# Altium PCB WLS.PcbDoc
Units mil, origin at the board's own origin, x right, y up, seen from the top; angles counter-clockwise.
Board outline 4800 x 7000 mil, 2 copper layers (Top Layer, Bottom Layer), stack 12.8 mil thick; 34 components, 41 nets, 135 pads, 0 vias.
Unrouted connection lines stored in the file: 8.
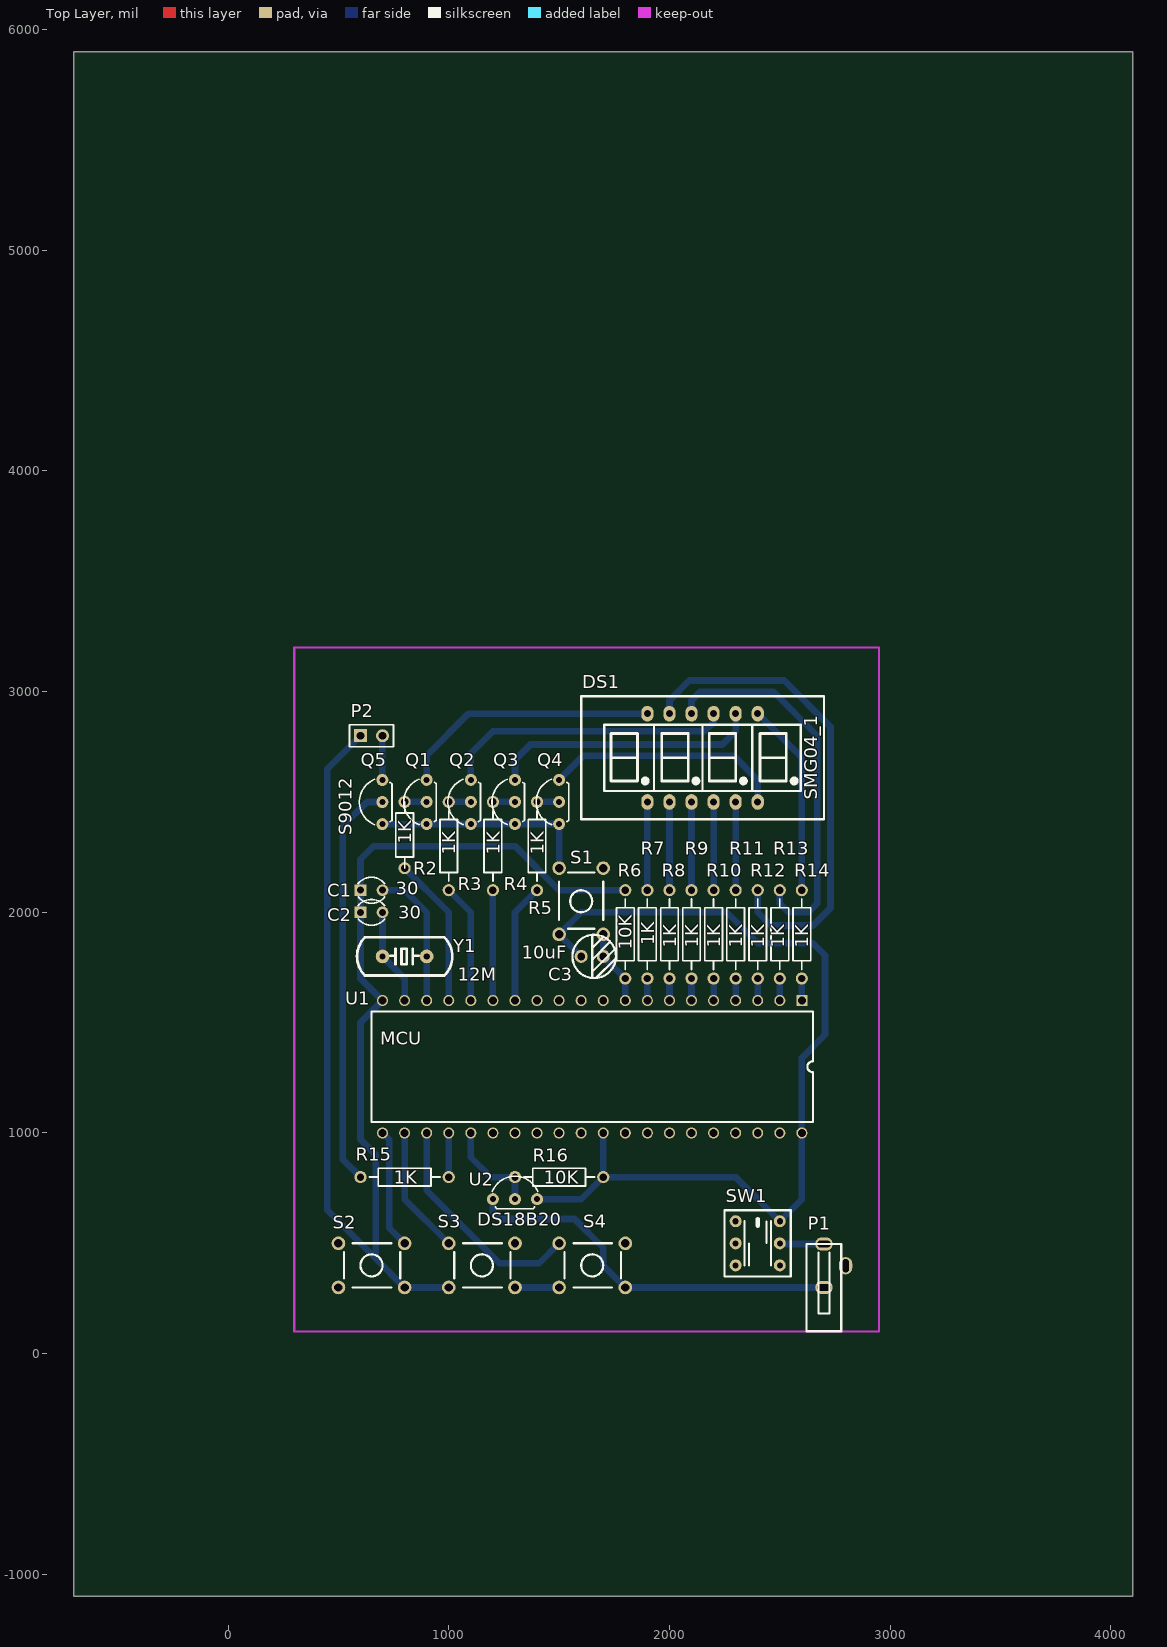
[diagram p0: Top Layer view]
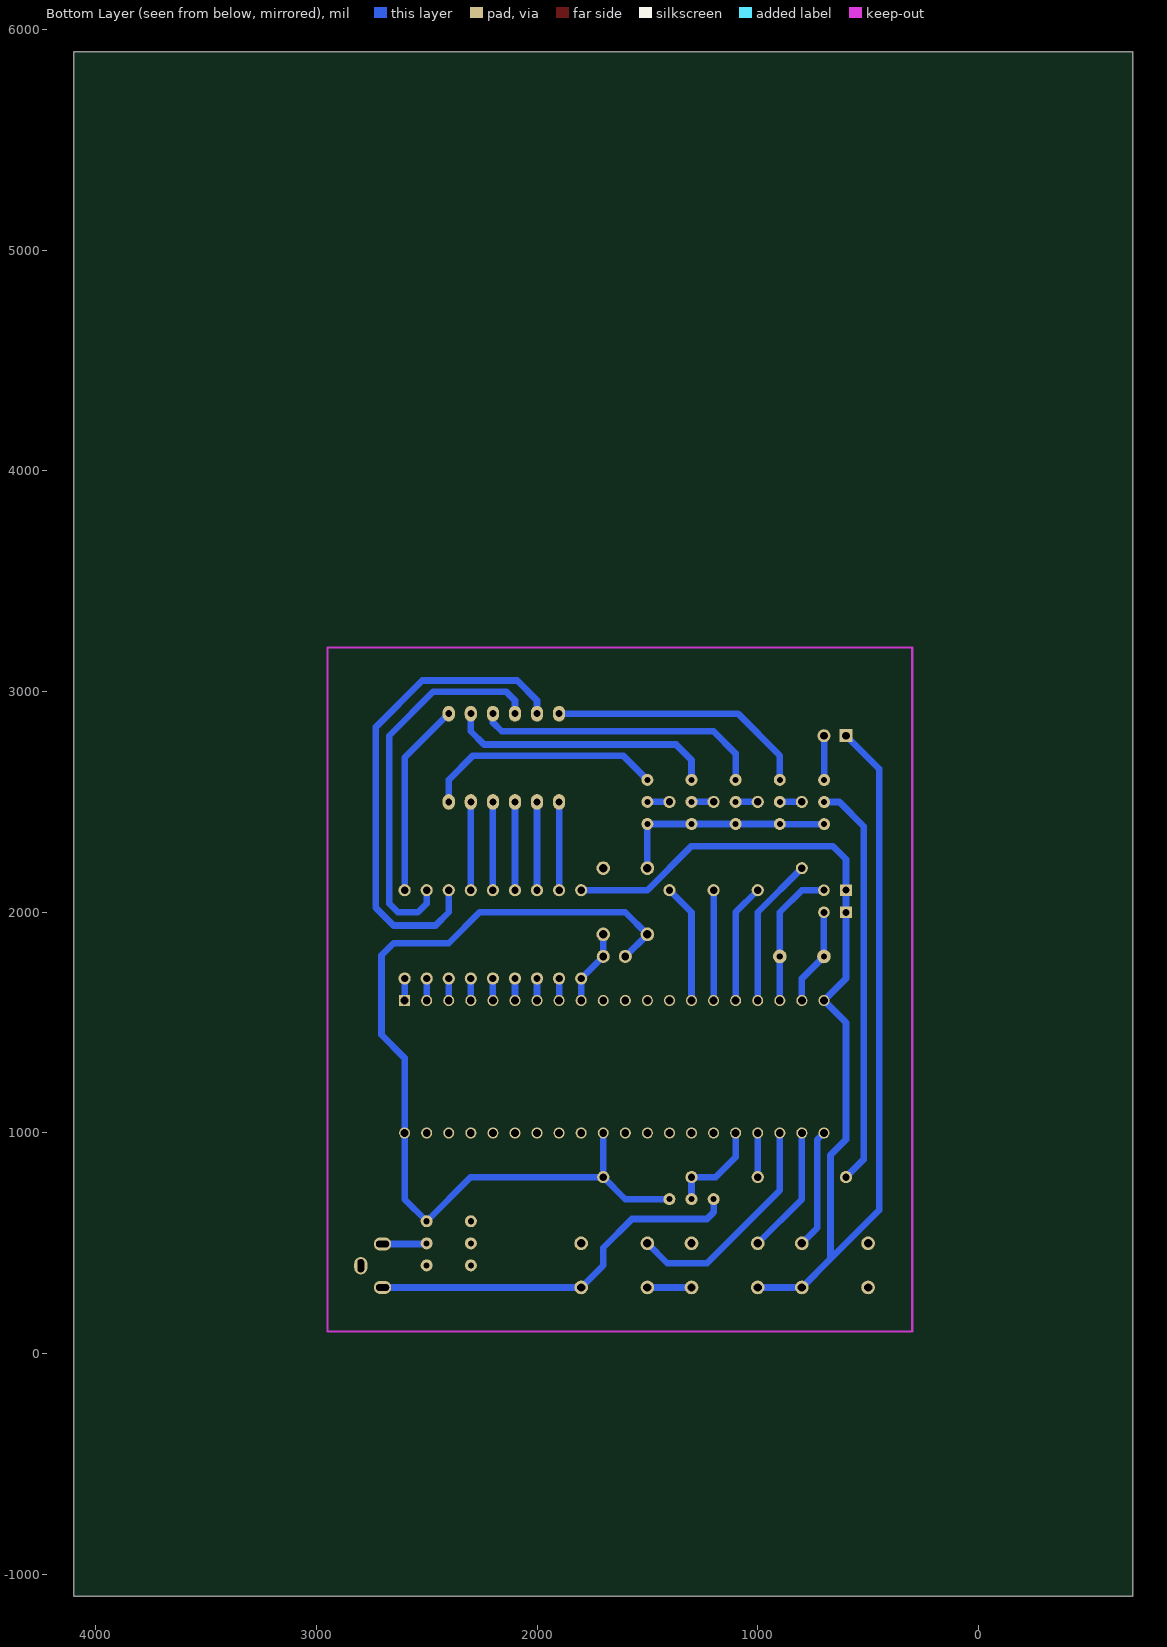
[diagram p1: Bottom Layer view, seen from below]

## Layer stack, top to bottom
Top Solder: solder mask 0.4, Solder Resist, Dk 3.5
Top Layer: signal copper 1.4
Dielectric 1: core 10, FR-4, Dk 4.2
Bottom Layer: signal copper 1.4
Bottom Solder: solder mask 0.4, Solder Resist, Dk 3.5

## Board outline
-700,5900 4100,5900 4100,-1100 -700,-1100

## Design rules (kind name [scope] priority, off if disabled: settings)
Clearance [All] p1: gap=20 ignorepadtopadclearanceinfootprint=FALSE except(0: Arc-Hole Track-Hole SMDPad-Hole THPad-Hole Via-Hole Fill-Hole Poly-Hole Region-Hole Text-Hole)
ComponentClearance [All] p1: gap=0 collisioncheckmode=3 verticalgap=0 showdistances=FALSE
PolygonConnect [All] p1: connectstyle=Relief reliefconductorwidth=10 reliefentries=4 polygonreliefangle="90 Angle" airgapwidth=10
RoutingVias [All] p1: holewidth=28 width=50 viastyle="Through Hole" minholewidth=28 minwidth=50 maxholewidth=28 maxwidth=50
SolderMaskExpansion [All] p1: expansion=4 istentingtop=FALSE
UnRoutedNet [OnLayer('Top Layer')] p1:
Width [All] p1: maxlimit=100 minlimit=10 preferedwidth=20
28 further rules are at their usual default settings.

## Components (designator, comment, footprint, x,y, rotation, side; value= is the part's Value field where it differs from the comment)
C1 "30" CCP-4X5 600,2100 r0 top
C2 "30" CCP-4X5 600,2000 r0 top
C3 "10uF" CRB-2.54/5MM 1600,1800 r0 top
DS1 "SMG04_1" SMG04_1 1900,2500 r0 top
P1 "Header 2" DC002 2700,496.85 r180 top
P2 "Header 2" HDR1X2 600,2800 r0 top
Q1 "S9012" TO-92 901,2500.5 r180 top
Q2 "S9012" TO-92 1101,2500.5 r180 top
Q3 "S9012" TO-92 1301,2500.5 r180 top
Q4 "S9012" TO-92 1501,2500.5 r180 top
Q5 "S9012" TO-92 700,2500 r180 top
R2 "1K" RAXIAL-0.4_D 800,2500 r270 top
R3 "1K" RAXIAL-0.4 1000,2300 r270 top
R4 "1K" RAXIAL-0.4 1200,2300 r270 top
R5 "1K" RAXIAL-0.4 1400,2300 r270 top
R6 "10K" RAXIAL-0.4 1800,1900 r270 top
R7 "1K" RAXIAL-0.4 1900,1900 r90 top
R8 "1K" RAXIAL-0.4 2000,1900 r90 top
R9 "1K" RAXIAL-0.4 2100,1900 r90 top
R10 "1K" RAXIAL-0.4 2200,1900 r90 top
R11 "1K" RAXIAL-0.4 2300,1900 r90 top
R12 "1K" RAXIAL-0.4 2400,1900 r90 top
R13 "1K" RAXIAL-0.4 2500,1900 r90 top
R14 "1K" RAXIAL-0.4 2600,1900 r90 top
R15 "1K" RAXIAL-0.4 800,800 r180 top
R16 "10K" RAXIAL-0.4 1500,800 r0 top
S1 "SW-PB" SW6*6*5 1700,2200 r270 top
S2 "SW-PB" SW6*6*5 800,300 r180 top
S3 "SW-PB" SW6*6*5 1300,300 r180 top
S4 "SW-PB" SW6*6*5 1800,300 r180 top
SW1 "sw-灰色" SW8*8 2400,500 r270 top
U1 "MCU" DIP40 2600,1600 r270 top
U2 "DS18B20" DS18B20 1300.5,699 r90 top
Y1 "12M" JZXTAL1 900,1800 r180 top

## Footprints (in the part's own frame and the unit in brackets; to place one, negate y for a bottom-side part, rotate by r counter-clockwise, add the part's x,y. Pads: shape width x height; smd on the part's side, far side on the other; paste and mask are expansions set on the pad)
CCP-4X5 [mm] "瓷片电容 - 直插"
  rect 1.35x1.35 hole 0.8: 1(0,0)
  round 1.35 hole 0.8: 2(2.54,0)
  silkscreen extent -0.28,-1.49 2.81,1.48
CRB-2.54/5MM [mm] "电解电容10uf 脚间距2.54/mm外直径5mm"
  round 1.5 hole 0.9: 1(0,0) 2(2.54,0)
  silkscreen extent -1,-2.5 4,2.5
DC002 [mil] "电源插座 - 1.3mm*3.5mm,插头内径1.3外径3.5"
  oval 78.74x60 hole 30 slot 59.06 at 0 deg: 1(0,0) 2(0,196.85)
  oval 60x78.74 hole 30 slot 59.06 at 90 deg: 3(-98.43,98.43)
  silkscreen extent -79,0 79,395
DIP40 [mm] "IC座 - 40P"
  rect 1.27x1.27 hole 0.9: 1(0,0)
  round 1.27 hole 0.9: 2(0,-2.54) 3(0,-5.08) 4(0,-7.62) 5(0,-10.16) 6(0,-12.7) 7(0,-15.24) 8(0,-17.78) 9(0,-20.32) 10(0,-22.86) 11(0,-25.4) 12(0,-27.94) 13(0,-30.48) 14(0,-33.02) 15(0,-35.56) 16(0,-38.1) 17(0,-40.64) 18(0,-43.18) 19(0,-45.72) 20(0,-48.26) 21(15.24,-48.26) 22(15.24,-45.72) 23(15.24,-43.18) 24(15.24,-40.64) 25(15.24,-38.1) 26(15.24,-35.56) 27(15.24,-33.02) 28(15.24,-30.48) 29(15.24,-27.94) 30(15.24,-25.4) 31(15.24,-22.86) 32(15.24,-20.32) 33(15.24,-17.78) 34(15.24,-15.24) 35(15.24,-12.7) 36(15.24,-10.16) 37(15.24,-7.62) 38(15.24,-5.08) 39(15.24,-2.54) 40(15.24,0)
  silkscreen extent 1.27,-49.53 13.97,1.27
DS18B20 [mm] "18B20温度管"
  round 1.38 hole 0.7: 1(0.025,2.553) 2(0.025,0.013) 3(0.025,-2.527)
  silkscreen extent -1.08,-2.6 2.67,2.62
HDR1X2 [mm] "Connector; Header; 2 Position"
  rect 1.5x1.5 hole 0.9: 1(0,0)
  round 1.5 hole 0.9: 2(2.54,0)
  silkscreen extent -1.27,-1.27 3.81,1.27
JZXTAL1 [mil] "直插晶振"
  round 62 hole 28: 1(0,0) 2(200,0)
  silkscreen extent -116,-87 316,87
RAXIAL-0.4 [mm] "色环电阻 - 2/1W"
  round 1.4 hole 0.85: 1(-5.08,0) 2(5.08,0)
  silkscreen extent -4.06,-1.02 4.06,1.02
RAXIAL-0.4_D [mm] "色环电阻 短封装 2/1W"
  round 1.4 hole 0.85: 1(0,0) 2(7.62,0)
  silkscreen extent 0,-1.02 7.62,1.02
SMG04_1 [mm] "3.6寸 共阳四位数码管"
  oval 1.4x1.8 hole 0.8: 1(0,0) 2(2.54,0) 3(5.08,0) 4(7.62,0) 5(10.16,0) 6(12.7,0) 7(12.7,10.16) 8(10.16,10.16) 9(7.62,10.16) 10(5.08,10.16) 11(2.54,10.16) 12(0,10.16)
  silkscreen extent -7.62,-2 20.32,12.16
SW6*6*5 [mil] "按键6X6X5MM"
  round 62 hole 38: 1(0,0) 2(0,-200) 3(300,0) 4(300,-200)
  silkscreen extent 20,-200 275,0
SW8*8 [mm] "8*8mm自锁按键"
  round 1.38 hole 0.7: 1(-2.54,-2.54) 2(0,-2.54) 3(2.54,-2.54) 4(2.54,2.54) 5(0,2.54) 6(-2.54,2.54)
  silkscreen extent -3.81,-3.81 3.81,3.81
TO-92 [mm] "直插三极管S9012,S8050"
  round 1.38 hole 0.7: B(0.025,0.013) C(0.025,-2.527) E(0.025,2.553)
  silkscreen extent -1.08,-2.6 2.67,2.62

## Part data
C1 C2: library part CAP, "电容"
C3: library part "Cap Pol1", "Polarized Capacitor (Radial)"
P1 P2: "Header, 2-Pin"
Q1 Q2 Q3 Q4 Q5: "PNP 三极管"
R2 R3 R4 R5 R6 R7 R8 R9 R10 R11 R12 R13 R14 R15 R16: library part RES2
S1 S2 S3 S4: "Switch"
U1: library part U1
Y1: library part 16M, "Crystal Oscillator"

## Nets (pads, with @x,y where several pads share a name; then routed paths per layer and width w, separated by ;. In a path a pad name is that pad's centre, name@x,y a point inside that pad or via, vN(x,y) a via of type N, cw(c..) or ccw(c..) an arc to the next point about the centre after c; other vN are vias at no path point)
1H: DS1.12 Q1.C | length 1188.7
  Bottom Layer w30: Q1.C 900,2710 1090,2900 DS1.12
2H: DS1.9 Q2.C | length 1318
  Bottom Layer w30: Q2.C 1100,2720 1200,2820 2160,2820 2200,2860 DS1.9
3H: DS1.8 Q3.C | length 1223.8
  Bottom Layer w30: Q3.C 1300,2690 1370,2760 2240,2760 2300,2820 DS1.8
4H: DS1.6 Q4.C | length 1091.1
  Bottom Layer w30: Q4.C 1610,2710 2290,2710 2400,2600 DS1.6
GND: C1.1 C2.1 P1.2 P2.1 R6.1 S2.1 S2.3 S3.1 S3.3 S4.1 S4.3 U1.20 U2.1 | length 8084.3
  Bottom Layer w30: P2.1 450,2650 450,650 670,430 ; S3.3 S2.1 670,430 ; U2.1 1200,640 1230,610 1570,610 1700,480 1700,400 S4.1 P1.2 ; S3.1@1310,300 S4.3 S4.3@1510,300 ; R6.1 1500,2100 1300,2300 660,2300 600,2240 C1.1 C2.1 600,1700 U1.20 600,1500 600,970 670,900 670,430
NetC1_2: C1.2 U1.18 Y1.1 | length 641.4
  Bottom Layer w30: C1.2 800,2100 900,2000 Y1.1 U1.18
NetC2_2: C2.2 U1.19 Y1.2 | length 441.4
  Bottom Layer w30: C2.2 Y1.2 800,1700 U1.19
NetC3_2: C3.2 R6.2 S1.1 S1.3 U1.9 | length 341.4
  Bottom Layer w30: S1.3 C3.2 R6.2 U1.9
NetDS1_1: DS1.1 R7.2 | length 400
  Bottom Layer w30: R7.2 DS1.1
NetDS1_2: DS1.2 R8.2 | length 400
  Bottom Layer w30: R8.2 DS1.2
NetDS1_3: DS1.3 R9.2 | length 400
  Bottom Layer w30: R9.2 DS1.3
NetDS1_4: DS1.4 R10.2 | length 400
  Bottom Layer w30: R10.2 DS1.4
NetDS1_5: DS1.5 R11.2 | length 400
  Bottom Layer w30: R11.2 DS1.5
NetDS1_7: DS1.7 R14.2 | length 882.8
  Bottom Layer w30: DS1.7 2600,2700 R14.2
NetDS1_10: DS1.10 R13.2 | length 1752.5
  Bottom Layer w30: DS1.10 2100,2960 2140,3000 2470,3000 2670,2800 2670,2040 2630,2000 2540,2000 2500,2040 R13.2
NetDS1_11: DS1.11 R12.2 | length 2222.3
  Bottom Layer w30: DS1.11 2000,2960 2090,3050 2520,3050 2730,2840 2730,2020 2650,1940 2460,1940 2400,2000 R12.2
NetP1_1: P1.1 SW1.5 | length 201.3
  Bottom Layer w30: SW1.5 2503.15,496.85 P1.1
NetP2_2: P2.2 Q5.C | length 200.5
  Bottom Layer w30: Q5.C P2.2@699,2800
NetQ1_B: Q1.B R2.1 | length 100
  Bottom Layer w30: R2.1 Q1.B
NetQ2_B: Q2.B R3.1 | length 100
  Bottom Layer w30: R3.1 Q2.B
NetQ3_B: Q3.B R4.1 | length 100
  Bottom Layer w30: R4.1 Q3.B
NetQ4_B: Q4.B R5.1 | length 100
  Bottom Layer w30: R5.1 Q4.B
NetQ5_B: Q5.B R15.2 | length 1847.2
  Bottom Layer w30: R15.2 520,880 520,2389.5 630,2499.5 Q5.B
P10: R14.1 U1.1 | length 100
  Bottom Layer w30: U1.1 R14.1
P11: R13.1 U1.2 | length 100
  Bottom Layer w30: U1.2 R13.1
P12: R12.1 U1.3 | length 100
  Bottom Layer w30: U1.3 R12.1
P13: R11.1 U1.4 | length 100
  Bottom Layer w30: U1.4 R11.1
P14: R10.1 U1.5 | length 100
  Bottom Layer w30: U1.5 R10.1
P15: R9.1 U1.6 | length 100
  Bottom Layer w30: U1.6 R9.1
P16: R8.1 U1.7 | length 100
  Bottom Layer w30: U1.7 R8.1
P17: R7.1 U1.8 | length 100
  Bottom Layer w30: U1.8 R7.1
P20: S2.2 S2.4 U1.21 | length 541.4
  Bottom Layer w30: U1.21 730,970 730,570 S2.2
P21: S3.2 S3.4 U1.22 | length 582.8
  Bottom Layer w30: U1.22 800,700 S3.4
P22: S4.2 S4.4 U1.23 | length 1034
  Bottom Layer w30: U1.23 900,740 1230,410 1410,410 S4.4
P23: R15.1 U1.24 | length 200
  Bottom Layer w30: R15.1 U1.24
P24: R16.1 U1.25 U2.2 | length 447.3
  Bottom Layer w30: U1.25 1100,890 1190,800 R16.1 U2.2
P34: R5.2 U1.14 | length 541.4
  Bottom Layer w30: U1.14 1300,2000 R5.2
P35: R4.2 U1.15 | length 500
  Bottom Layer w30: U1.15 R4.2
P36: R3.2 U1.16 | length 541.4
  Bottom Layer w30: R3.2 1100,2000 U1.16
P37: R2.2 U1.17 | length 682.8
  Bottom Layer w30: R2.2 1000,2000 U1.17
VCC: C3.1 Q1.E Q2.E Q3.E Q4.E Q5.E R16.2 S1.2 S1.4 SW1.6 U1.31 U1.40 U2.3 | length 5198.1
  Bottom Layer w30: Q5.E 899.5,2399.5 Q1.E Q2.E Q3.E Q4.E S1.2 ; U2.3 1600,700 R16.2 ; C3.1@1610,1790 C3.1 S1.4 1600,2000 2260,2000 2400,1860 2650,1860 2705,1805 2705,1445 2600,1340 U1.40 2600,700 SW1.6 2300,800 R16.2 ; U1.31 R16.2
pads on no net: P1.3 SW1.1 SW1.2 SW1.3 SW1.4 U1.10 U1.11 U1.12 U1.13 U1.26 U1.27 U1.28 U1.29 U1.30 U1.32 U1.33 U1.34 U1.35 U1.36 U1.37 U1.38 U1.39

## Keep-outs
Keep-Out Layer:
  lines w10: 300,100 300,3200 2950,3200 2950,100 300,100